# Altium PCB PCB1.PcbDoc
Units mil, origin at the board's own origin, x right, y up, seen from the top; angles counter-clockwise.
Board outline 1900 x 2285 mil, 2 copper layers (Top Layer, Bottom Layer); 23 components, 12 nets, 57 pads, 4 vias.
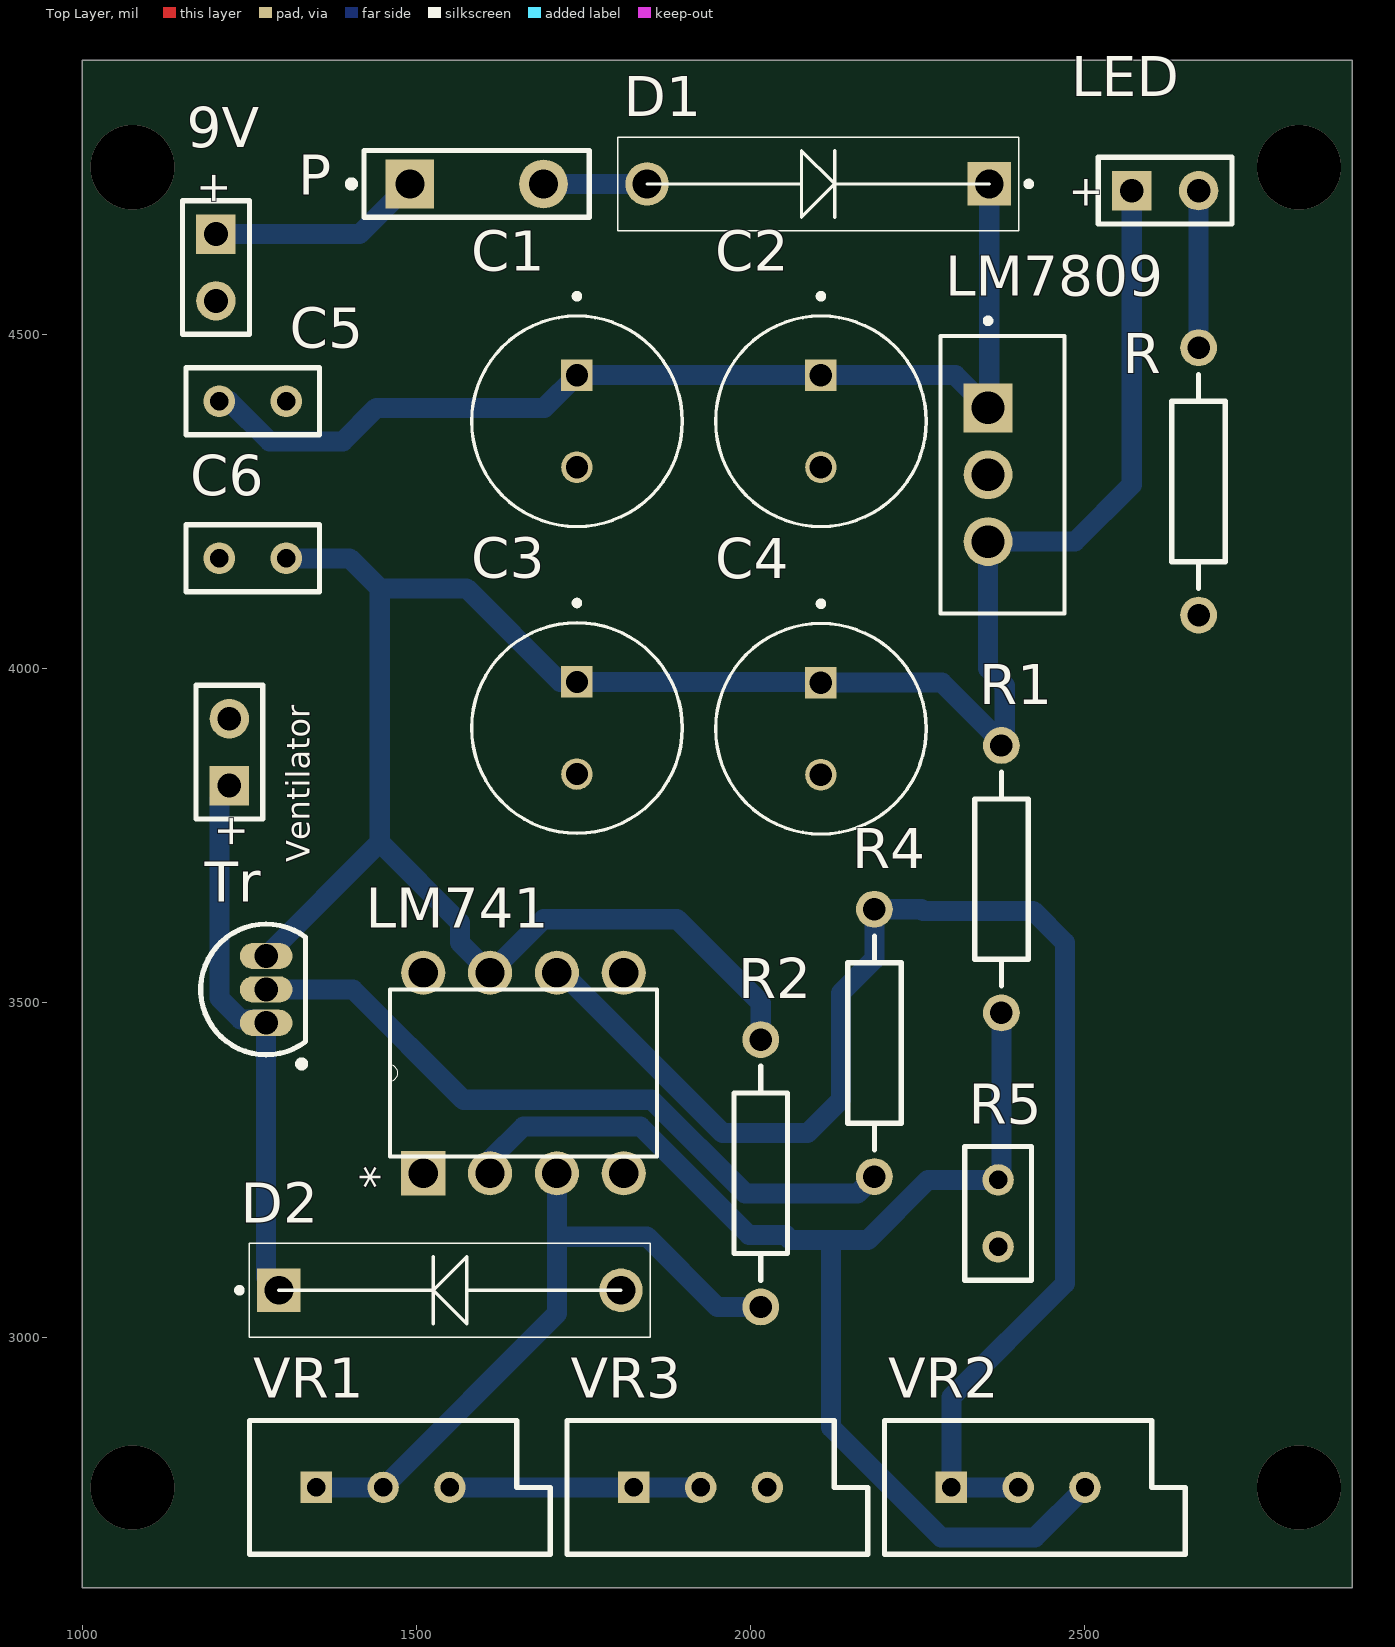
[diagram p0: Top Layer view]
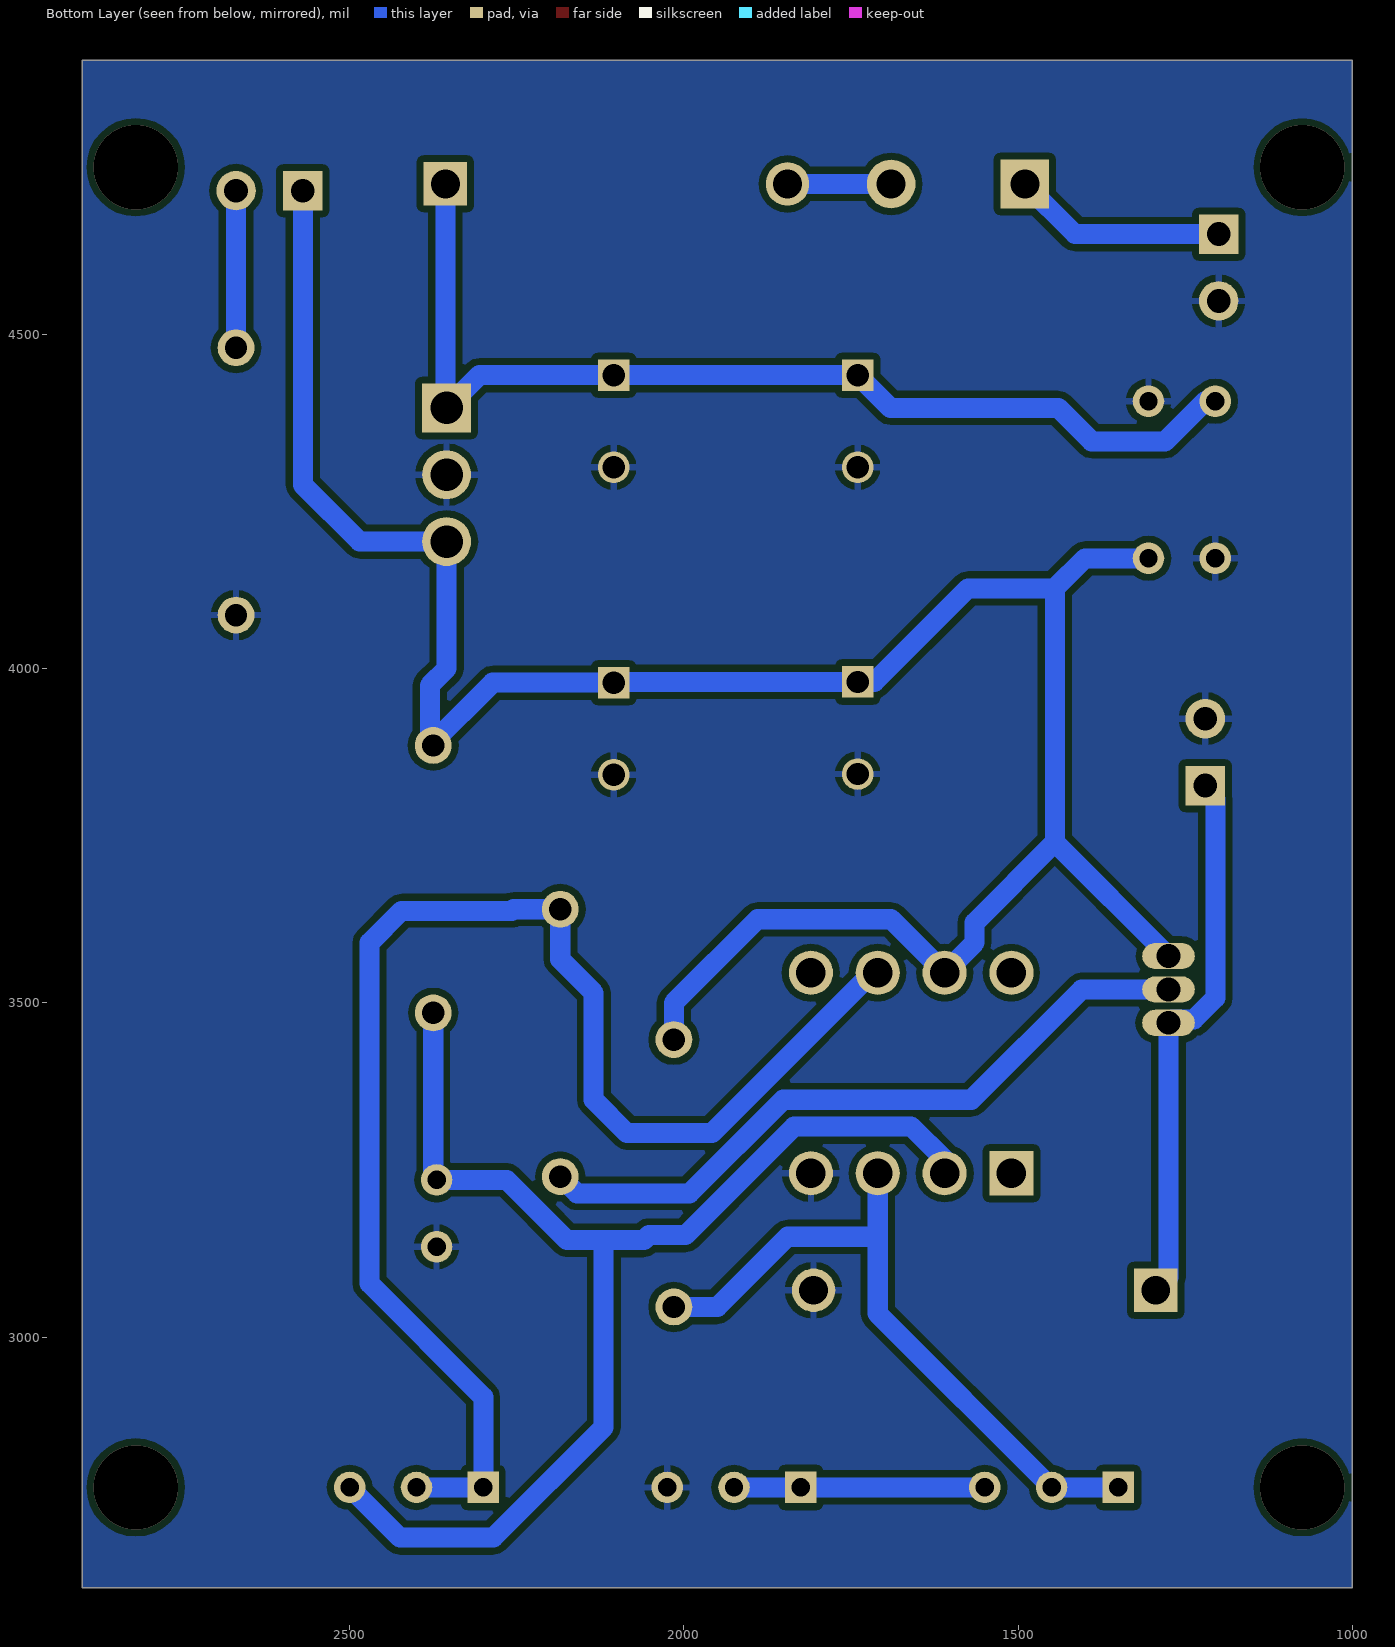
[diagram p1: Bottom Layer view, seen from below]
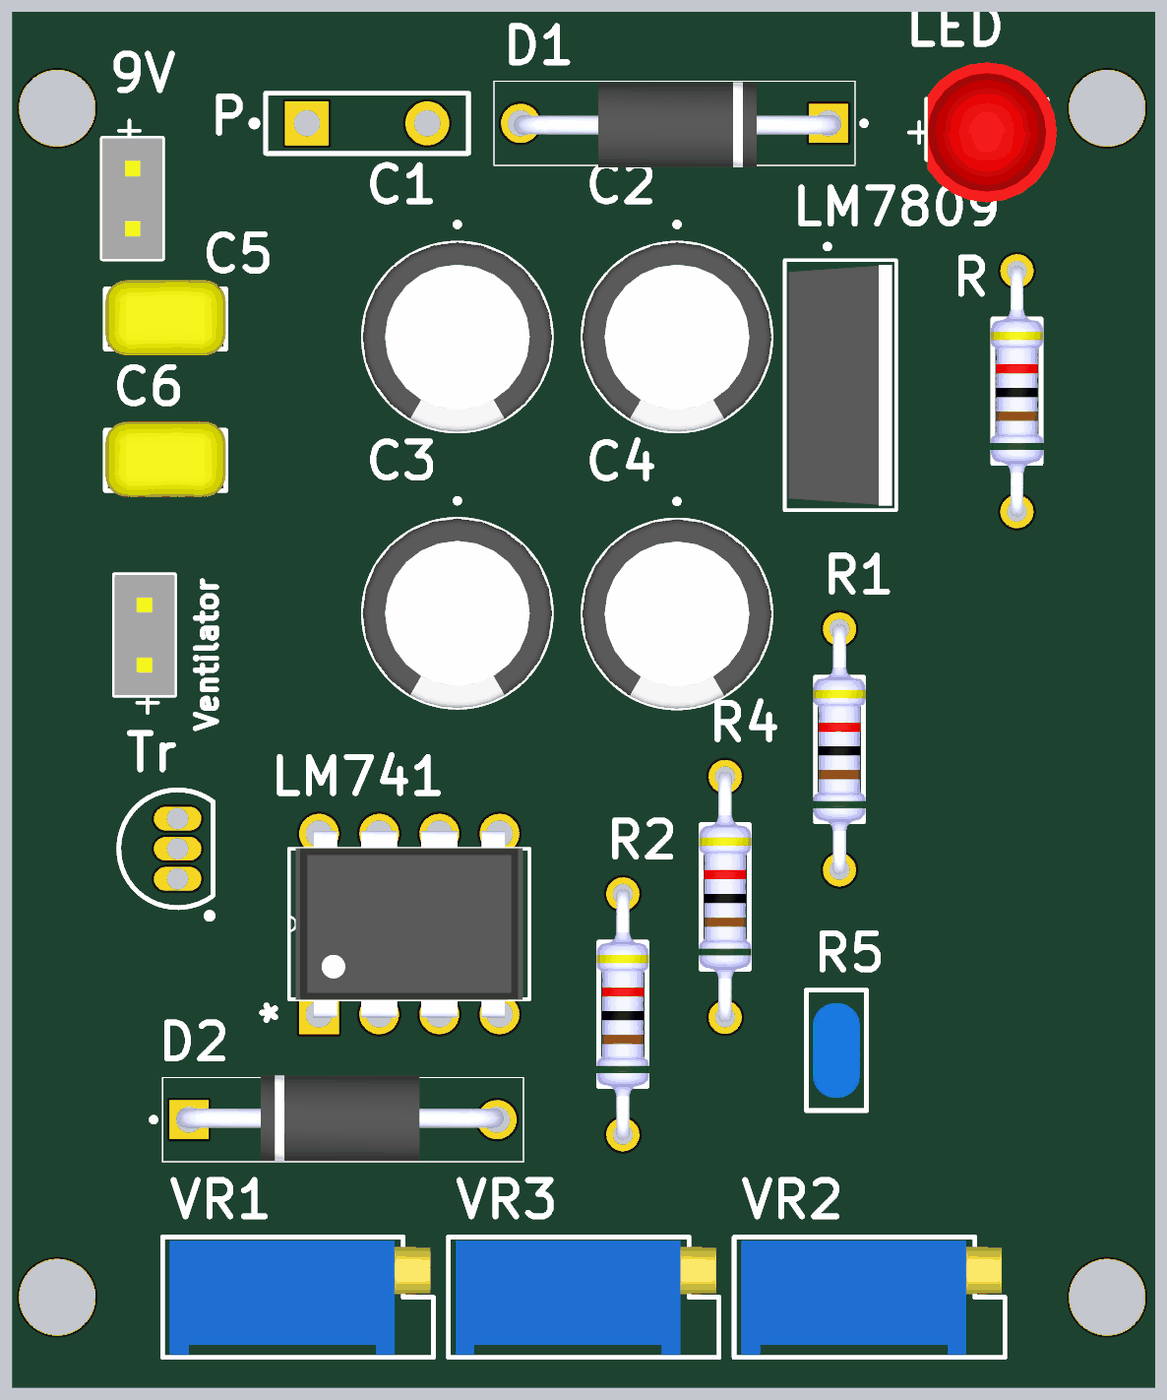
[diagram p2: 3D render of the assembled board from above, using the file's embedded part models]

## Layer stack, top to bottom
Top Solder: solder mask 0.4, Solder Resist, Dk 3.5
Top Layer: signal copper 1.4
Dielectric 1: dielectric 12.6, FR-4, Dk 4.8
Bottom Layer: signal copper 1.4
Bottom Solder: solder mask 0.4, Solder Resist, Dk 3.5

## Board outline
1000,2625 2900,2625 2900,4910 1000,4910

## Design rules (kind name [scope] priority, off if disabled: settings)
Clearance Polygon [InPolygon] p1: gap=10 ignorepadtopadclearanceinfootprint=FALSE
Clearance [All] p2: gap=10 ignorepadtopadclearanceinfootprint=FALSE
PolygonConnect [All] p1: connectstyle=Relief reliefconductorwidth=10 reliefentries=4 polygonreliefangle="90 Angle" airgapwidth=10
RoomDefinition Sema [InComponentClass('Sema')] p1: confinementstyle=ConfineIn formatcopy=TRUE lockcomponents=FALSE outline 0,0 2000,0 2000,1000 0,1000
RoutingLayers [All] p1: top layer_v5=FALSE bottom layer_v5=TRUE
RoutingVias [All] p1: holewidth=28 width=50 viastyle="Through Hole" minholewidth=28 minwidth=50 maxholewidth=28 maxwidth=50
SolderMaskExpansion [All] p1: expansion=4
Width [All] p1: maxlimit=40 minlimit=20 preferedwidth=30
29 further rules are at their usual default settings.

## Components (designator, comment, footprint, x,y, rotation, side; value= is the part's Value field where it differs from the comment)
9V "9-12V" BAT-2 1200,4600 r270 top
C1 "Cap Pol1" CAPPRD350W60D800H1150 1740,4370 r270 top value=100nF
C2 "Cap Pol1" CAPPRD350W60D800H1150 2105,4370 r270 top value=100nF
C3 "Cap Pol1" CAPPRD350W60D800H1150 1740,3911.1 r270 top value=100nF
C4 "Cap Pol1" CAPPRD350W60D800H1150 2105,3910 r270 top value=100nF
C5 "Cap" RAD-0.1-2 1255,4400 r0 top value=100uF
C6 "Cap" RAD-0.1-2 1255,4165 r0 top value=100uF
D1 "Diode" DIOAD1300W80L670D310 2100.91,4725 r180 top
D2 "IN 4148" DIOAD1300W80L670D310 1550,3070 r0 top
LED "LED" LED-2 2620,4715 r0 top
LM741 "LM741" DIP254P762X508-8 1810,3545 r90 top
LM7809 "LM7809" TO254P1054X470X2600-3 2355,4390 r270 top
P "SW-SPST" SPST-2 1590,4725 r0 top
R "Res1" AXIAL-0.4 2670,4280 r90 top value=4K7
R1 "Res1" AXIAL-0.4 2375,3685 r90 top value=10K
R2 "Res1" AXIAL-0.4 2015,3245 r90 top value=10K
R4 "Res1" AXIAL-0.4 2185,3440 r90 top value=10K
R5 "10K NTC Thermistor" RAD-0.1 2370,3185 r270 top
Tr "BC327-40" TO-92A 1275,3520 r0 top
Ventilator "Ventilator" BAT-2 1220,3875 r90 top
VR1 "Range" VR5 1450,2775 r0 top value=10K
VR2 "Histerezis" VR5 2400,2775 r0 top value=1M
VR3 "Dial" VR5 1925,2775 r0 top value=5K

## Footprints (in the part's own frame and the unit in brackets; to place one, negate y for a bottom-side part, rotate by r counter-clockwise, add the part's x,y. Pads: shape width x height; smd on the part's side, far side on the other; paste and mask are expansions set on the pad)
AXIAL-0.4 [mm] "Axial Device, Thru-Hole; 2 Leads; 0.4 in Pin Spacing"
  round 1.4 hole 0.85: 1(-5.08,0) 2(5.08,0)
  silkscreen extent -4.06,-1.02 4.06,1.02, body extent -5.28,-1.11 5.28,1.11, height 3.96
BAT-2 [mm] "Battery; 2 Leads"
  rect 1.5x1.5 hole 0.9: 1(-1.27,0)
  round 1.5 hole 0.9: 2(1.27,0)
  silkscreen extent -2.54,-1.27 2.54,1.27, body extent -2.54,-1.27 2.54,1.27, height 10.62
CAPPRD350W60D800H1150 [mm]
  rect 1.2x1.2 hole 0.85: 1(-1.75,0)
  round 1.2 hole 0.85: 2(1.75,0)
  silkscreen extent -4.85,-4 4,4, body extent -4,-4 4,4, height 11.5
DIOAD1300W80L670D310 [mm]
  round 1.65 hole 1.1: 1(6.5,0)
  rect 1.65x1.65 hole 1.1: 2(-6.5,0)
  silkscreen extent -8.1,-1.78 7.62,1.78, body extent -7.03,-1.73 6.77,1.87, height 3.6
DIP254P762X508-8 [mil]
  rect 66x66 hole 44: 1(-300,300)
  round 66 hole 44: 2(-300,200) 3(-300,100) 4(-300,0) 5(0,0) 6(0,100) 7(0,200) 8(0,300)
  silkscreen extent -275,-50 -25,350, body extent -305,-39 5,339, height 155
LED-2 [mm] "Battery; 2 Leads"
  rect 1.5x1.5 hole 0.9: 1(-1.27,0)
  round 1.5 hole 0.9: 2(1.27,0)
  silkscreen extent -2.54,-1.27 2.54,1.27, body extent -2.5,-3.08 2.95,2.82, height 9.6
RAD-0.1 [mm] "Radial Cap, Thru-Hole; 2 Leads; 0.1 in Pin Spacing"
  round 1.2 hole 0.7: 1(-1.27,0) 2(1.27,0)
  silkscreen extent -2.54,-1.27 2.54,1.27, body extent -2,-1 2,1, height 7.49
RAD-0.1-2 [mm] "Radial Cap, Thru-Hole; 2 Leads; 0.1 in Pin Spacing"
  round 1.2 hole 0.7: 1(-1.27,0) 2(1.27,0)
  silkscreen extent -2.54,-1.27 2.54,1.27, body extent -2.54,-1.54 2.54,1.64, height 6.84
SPST-2 [mm] "Switch; 2 Leads"
  rect 1.85x1.85 hole 1.1: 1(-2.54,0)
  round 1.85 hole 1.1: 2(2.54,0)
  silkscreen extent -4.89,-1.27 4.28,1.27
TO254P1054X470X2600-3 [mm]
  rect 1.86x1.86 / inner round 1.86 / far side rect 1.86x1.86 hole 1.24: 1(0,0)
  round 1.86 hole 1.24: 2(2.54,0) 3(5.08,0)
  silkscreen extent -3.41,-1.8 7.81,2.9, body extent -2.54,-1.63 7.62,2.72, height 20.4
TO-92A [mm] "TO, Flat Index; 3 In-Line, Axial Leads; Body Dia. 4.5mm; Leads 0.51 x 0.48 mm (max)"
  oval 2x1 hole 0.9: 1(0,-1.27) 2(0,0) 3(0,1.27)
  silkscreen extent -2.48,-2.95 1.5,2.48
VR5 [mm] "Thru-Hole; 3 Leads"
  rect 1.2x1.2 hole 0.7: 1(-2.54,0)
  round 1.2 hole 0.7: 2(0,0) 3(2.54,0)
  silkscreen extent -5.08,-2.54 6.35,2.54, body extent -4.78,-2.4 6.22,2.4, height 10

## Part data
9V: library part Battery, "Multicell Battery", LatestRevisionDate=17-Jul-2002, LatestRevisionNote="Re-released for DXP Platform.", PackageDescription="Battery; 2 Leads", PackageReference=BAT-2, Published=24-Mar-1999, Publisher="Altium Limited"
C1 C2 C3 C4: "Polarized Capacitor (Radial)", LatestRevisionDate=17-Jul-2002, LatestRevisionNote="Re-released for DXP Platform.", PackageDescription="Polarized Capacitor (Radial); 2 Leads", PackageReference=RB7.6-15, Published=8-Jun-2000, Publisher="Altium Limited"
C5 C6: "Capacitor", LatestRevisionDate=17-Jul-2002, LatestRevisionNote="Re-released for DXP Platform.", PackageDescription="Radial Cap, Thru-Hole; 2 Leads; 0.3 in Pin Spacing", PackageReference=RAD-0.3, Published=8-Jun-2000, Publisher="Altium Limited"
D1: "Default Diode", Code_JEDEC=DO-214-AB, LatestRevisionDate=17-Jul-2002, LatestRevisionNote="Re-released for DXP Platform.", PackageDescription="DO-214-AB/SMC; 2 C-Bend Leads; Body 7.9 x 5.9 mm, inc. leads (LxW)", PackageReference=SMC, PackageVersion=Sep-1996, Published=8-Jun-2000, Publisher="Altium Limited"
D2: library part Diode, "Default Diode", Code_JEDEC=DO-214-AB, LatestRevisionDate=17-Jul-2002, LatestRevisionNote="Re-released for DXP Platform.", PackageDescription="DO-214-AB/SMC; 2 C-Bend Leads; Body 7.9 x 5.9 mm, inc. leads (LxW)", PackageReference=SMC, PackageVersion=Sep-1996, Published=8-Jun-2000, Publisher="Altium Limited"
LED: library part LED1, "Typical RED GaAs LED", LatestRevisionDate=08-Jul-2005, LatestRevisionNote="Mech Layer 1 removed.", PackageDescription="LED; 2 Leads", PackageReference=LED-1, Published=8-Jun-2000, Publisher="Altium Limited"
LM741: library part LM741CN, "General Purpose Amplifier 1 Circuit 8-DIP", Package="DIP-8 ON Semiconductor", Availability="In Stock", Check_prices=https://www.snapeda.com/parts/LM741CN/ON%20Semiconductor/view-part/4797666/?ref=eda, MF="ON Semiconductor", MP=LM741CN, Price=None, SnapEDA_Link=https://www.snapeda.com/parts/LM741CN/ON%20Semiconductor/view-part/4797666/?ref=snap
LM7809: library part Component_1
P: "Single-Pole, Single-Throw Switch", LatestRevisionDate=17-Jul-2002, LatestRevisionNote="Re-released for DXP Platform.", PackageDescription="Switch; 2 Leads", PackageReference=SPST-2, Published=24-Mar-1999, Publisher="Altium Limited"
R R1 R2 R4: "Resistor", LatestRevisionDate=17-Jul-2002, LatestRevisionNote="Re-released for DXP Platform.", PackageDescription="Axial Device, Thru-Hole; 2 Leads; 0.3 in Pin Spacing", PackageReference=AXIAL-0.3, Published=8-Jun-2000, Publisher="Altium Limited"
R5: library part "Res Thermal", "Thermistor", Code_IPC=RESC2012, LatestRevisionDate=29-May-2009, LatestRevisionNote="IPC-7351 Footprint Added.", PackageDescription="Chip Resistor 0805 Case Size", PackageReference=6-0805, PackageVersion=Mar-2003, Published=24-Mar-1999, Publisher="Altium Limited"
Tr: library part 2N3906, "PNP General Purpose Amplifier", ComponentLink1Description="Manufacturer Link", ComponentLink1URL=http://www.fairchildsemi.com/, ComponentLink2Description=Datasheet, ComponentLink2URL=http://www.fairchildsemi.com/ds/2N%2F2N3906.pdf, DatasheetVersion=1997, LatestRevisionDate=15-Jan-2003, LatestRevisionNote="PCB Footprint 'BCY-W3/D4.7' replaced", PackageDescription="TO, Flat Index; 3 In-Line, Axial Leads; Body Dia. 4.5mm; Leads 0.51 x 0.48 mm (max)", PackageReference=TO-92A, PackageVersion=Sep-1998, Published=8-Jun-2000, Publisher="Altium Limited"
Ventilator: library part "Header 2", "Header, 2-Pin", LatestRevisionDate=17-Jul-2002, LatestRevisionNote="Re-released for DXP Platform.", Publisher="Altium Limited"
VR1 VR2 VR3: library part RPot, "Potentiometer", LatestRevisionDate=17-Jul-2002, LatestRevisionNote="Re-released for DXP Platform.", PackageDescription="Variable Resistor, Thru-Hole; 3 Leads", PackageReference=VR5, Published=8-Jun-2000, Publisher="Altium Limited", Set Position=0.5, Sim Note="Enter the Resistance value and the set point into parameter fields."

## Via types
v1: diameter 125.98, hole 125.98, Top Layer to Bottom Layer, 4 vias

## Nets (pads, with @x,y where several pads share a name; then routed paths per layer and width w, separated by ;. In a path a pad name is that pad's centre, name@x,y a point inside that pad or via, vN(x,y) a via of type N, cw(c..) or ccw(c..) an arc to the next point about the centre after c; other vN are vias at no path point)
GND: 9V.2 C1.2 C2.2 C3.2 C4.2 C5.2 C6.1 D2.1 LM741.4 LM7809.2 R5.2 R.1 Ventilator.2 VR3.3
Net9V_1: 9V.1 P.1 | length 321.1
  Bottom Layer w30: 9V.1 1415,4650 P.1
NetC1_1: C1.1 C2.1 C5.1 D1.2 LM7809.1 | length 1571.8
  Bottom Layer w30: C5.1 1220,4400 1280,4340 1390,4340 1440,4390 1691.1,4390 C1.1 C2.1 2306.1,4438.9 LM7809.1 2356.81,4391.81 D1.2
NetD1_1: D1.1 P.2 | length 155
  Bottom Layer w30: P.2 D1.1
NetD2_2: D2.2 Tr.1 Ventilator.1 | length 819.4
  Bottom Layer w30: Ventilator.1@1225,3825 1205,3805 1205,3507.12 1236.81,3475.32 1269.68,3475.32 Tr.1 1275,3089.09 D2.2
NetLED_2: LED.2 R.2 | length 235
  Bottom Layer w30: R.2 LED.2
NetLM741_2: LM741.2 R1.1 R5.1 VR2.3 | length 1919.9
  Bottom Layer w30: LM741.2 1610,3265 1660,3315 1835,3315 1997.44,3152.56 2052.44,3152.56 2060,3145 2120,3145 ; R1.1 2375,3240 R5.1 2265,3235 2175,3145 2120,3145 ; VR2.3 2425,2700 2285,2700 2120,2865 2120,3145
NetLM741_3: LM741.3 R2.1 VR1.1 VR1.2 | length 1026.2
  Bottom Layer w30: VR1.1 VR1.2 1710,3035 1710,3150 ; LM741.3 1710,3150 ; R2.1 1950,3045 1845,3150 1710,3150
NetLM741_6: LM741.6 R4.2 VR2.1 VR2.2 | length 2142
  Bottom Layer w30: LM741.6 1718.14,3545 1958.14,3305 2085,3305 2135,3355 2135,3515 2185,3565 R4.2 2255.12,3640 2257.56,3637.56 2422.44,3637.56 2470,3590 2470,3080 2300,2910 VR2.1 VR2.2
NetR4_1: R4.1 Tr.2 | length 1046.7
  Bottom Layer w30: Tr.2 1405,3520 1570,3355 1851.57,3355 1991.57,3215 2160,3215 R4.1
NetVR1_3: VR1.3 VR3.1 VR3.2 | length 375
  Bottom Layer w30: VR1.3 VR3.1 VR3.2
VCC: C3.1 C4.1 C6.2 LED.1 LM741.7 LM7809.3 R1.2 R2.2 Tr.3 | length 3625.2
  Bottom Layer w30: Tr.3 1445,3740 ; C6.2 1400,4165 1445,4120 ; R2.2 2015,3500 1890,3625 1690,3625 LM741.7 1565,3590 1565,3620 1445,3740 ; LED.1 2570,4275 2485,4190 LM7809.3 2355,4000 2380,3975 2380,3885 2286.1,3978.9 C4.1 2103.9,3980 C3.1 1715,3980 1575,4120 1445,4120 ; 1445,3740 1445,4120
pads on no net: LM741.1 LM741.5 LM741.8
copper on no net:
  other v1: 1075,2775 2820,2775 1075,4750 2820,4750

## Polygon pours and split planes (outlines as drawn)
GND on Bottom Layer "Bottom Layer-GND" (solid, pour order 2): 1000,4910 1000,2625 2900,2625 2900,4910

## Text inside footprints (layer, text, board x,y; h text height)
9V: Top Overlay "+" at 1177.28,4744.49 h45.28 r270
LED: Top Overlay "+" at 2475.51,4692.28 h45.28
LM741: Top Overlay "*" at 1466,3222 h50 r90; Mechanical 13 "*" at 1466,3222 h50 r90
Ventilator: Top Overlay "+" at 1242.72,3730.51 h45.28 r90